# EAGLE board LC adapter (EAGLE 6.5.0)
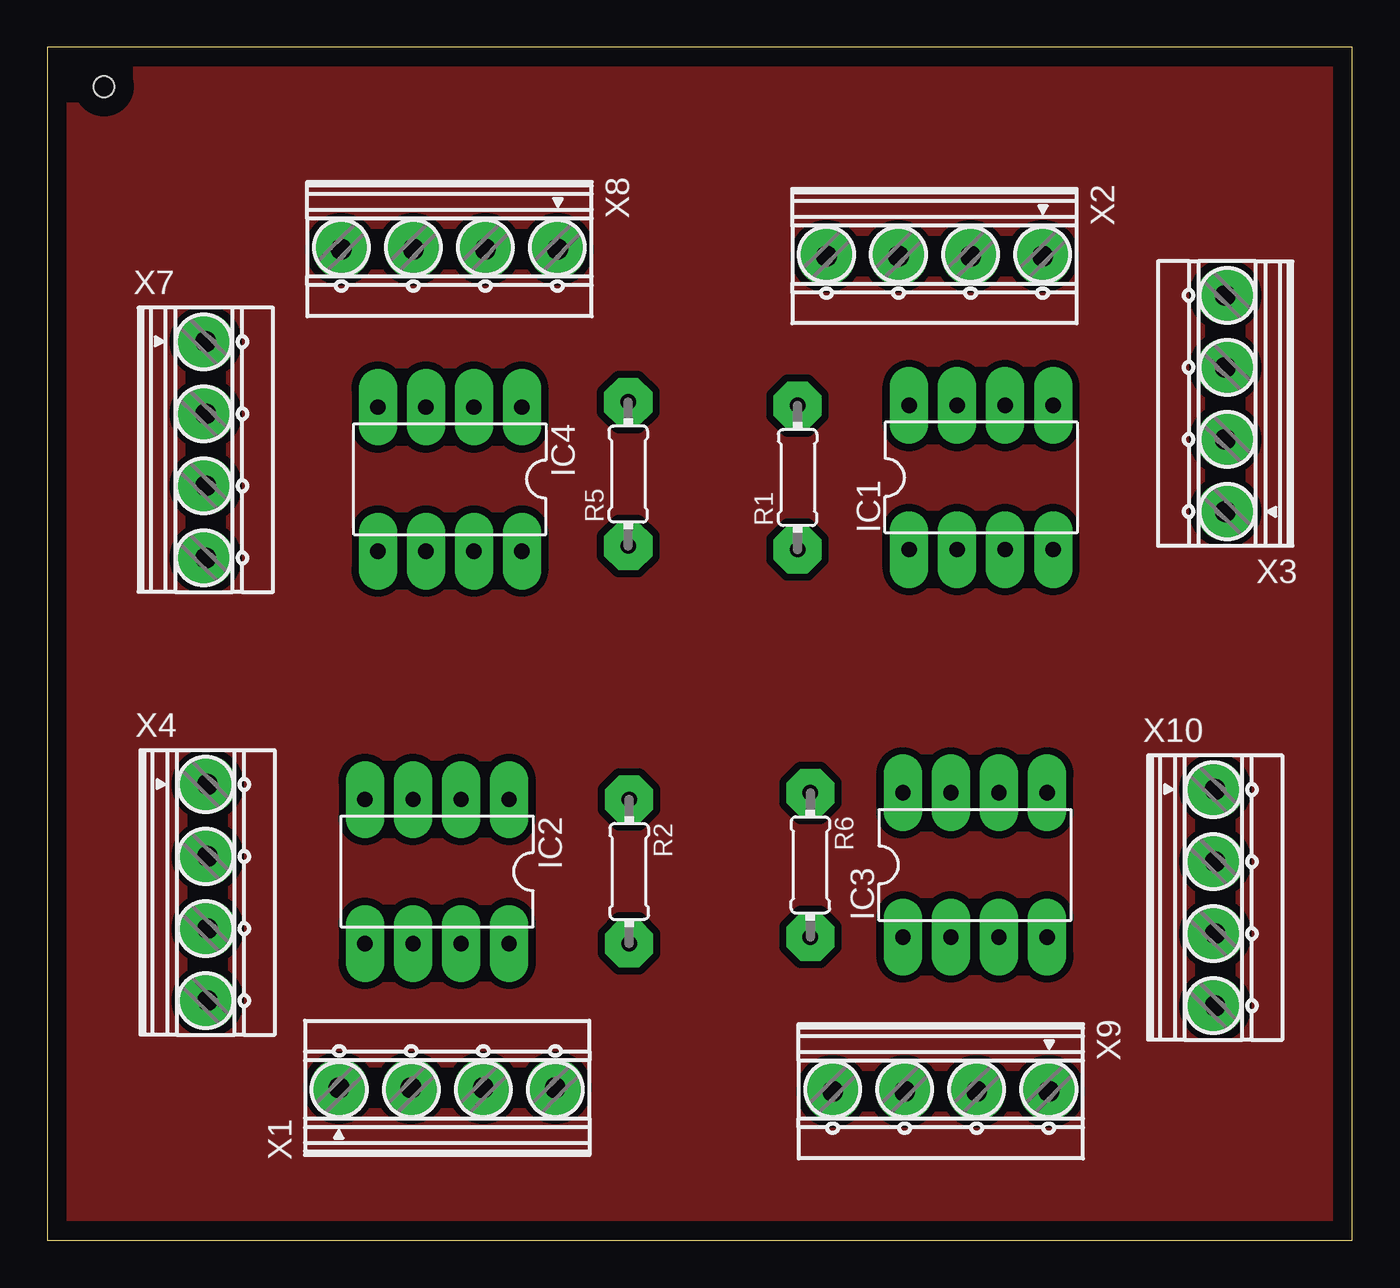
[diagram p0: board, top side]
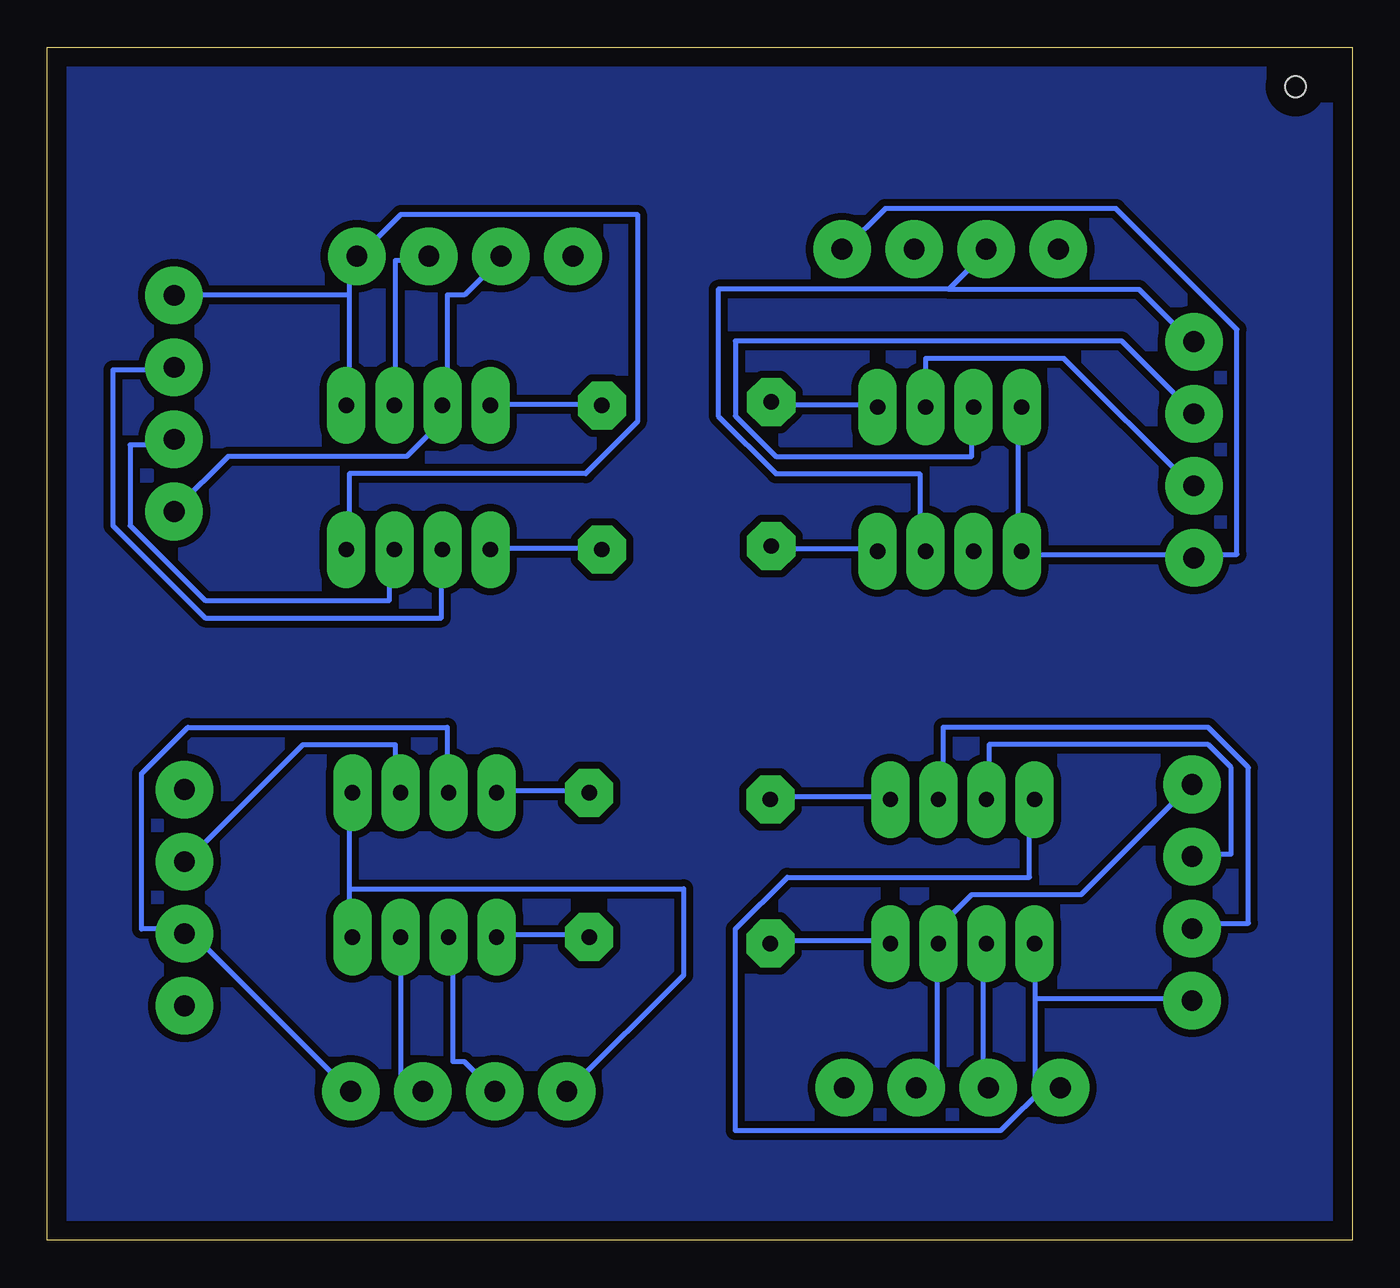
[diagram p1: board, bottom side, seen from below]

Size 69 x 63.09 mm. Coordinates in mm from the lower left corner, seen from the top.
Outline: 0,0 69,0 69,63.09 0,63.09 0,0
Copper layers (1*16): Top 0.035mm / dielectric 1.5mm / Bottom 0.035mm
Design rules "default *": minimum track width 10mil, minimum drill 24mil, track to track 15mil, track to pad 15mil, pad to pad 15mil, via to via 15mil, smd to smd 15mil, copper to edge 40mil, drill to drill 8mil, minimum pad ring 10mil, minimum via ring 8mil, stop-mask expansion 4mil, vias tented up to drill 0mil, thermal gap 10mil
Holes 1.1 mm at 3,61

## Footprints (pad centres in the part's own frame; a part is rotated, then mirrored left to right if it is on the bottom)
DIL08 = drill 0.813 pad 2.032 long: 1 -3.81,-3.81; 2 -1.27,-3.81; 3 1.27,-3.81; 4 3.81,-3.81; 5 3.81,3.81; 6 1.27,3.81; 7 -1.27,3.81; 8 -3.81,3.81
0204/7 = drill 0.813 pad 2.54 octagon: 1 -3.81,0; 2 3.81,0
1727036 = drill 1.1 pad 3.048: 1 -5.715,0; 2 -1.905,0; 3 1.905,0; 4 5.715,0

## Placement (x,y rotation side)
IC1  AD623N  [DIL08]  49.38,40.34 0 top
IC2  AD623N  [DIL08]  20.61,19.5 180 top
IC3  AD623N  [DIL08]  49.05,19.85 0 top
IC4  AD623N  [DIL08]  21.29,40.25 180 top
R1  160  [0204/7]  39.68,40.34 90 top
R2  160  [0204/7]  30.77,19.5 270 top
R5  [0204/7]  30.72,40.52 90 top
R6  [0204/7]  40.35,19.85 270 top
X1  1727036  [1727036]  21.15,8.07 0 top
X2  1727036  [1727036]  46.92,52.04 180 top
X3  1727036  [1727036]  62.29,44.26 90 top
X4  1727036  [1727036]  8.47,18.39 270 top
X7  1727036  [1727036]  8.37,41.8 270 top
X8  1727036  [1727036]  21.26,52.41 180 top
X9  1727036  [1727036]  47.24,7.88 180 top
X10  1727036  [1727036]  61.75,18.12 270 top

## Library data of the parts
IC1-IC4 = pmendes; MF: ALTERA CORPORATION; MPN: AD623ANZ; OC_FARNELL: 9603700; OC_NEWARK: 59K4402
R1 R2 R5 R6 = pmendes
X1-X4 X7-X10 = pmendes; MF: FARNELL; MPN: 1727036; OC_FARNELL: 3704592; OC_NEWARK: 71C4114

## Nets
N$1: IC1.1 R1.1
N$2: IC1.8 R1.2
N$3: IC2.1 R2.1
N$4: IC2.8 R2.2
N$5: IC1.7 X2.3 X3.1
N$6: IC1.6 X2.2
N$7: IC1.4 IC1.5 X2.1 X3.4
N$8: IC3.1 R6.2
N$9: IC1.3 X3.2
N$10: IC1.2 X3.3
N$11: IC3.8 R6.1
N$12: IC2.6 X1.2
N$13: IC3.3 X9.2
N$14: IC3.2 X9.3
N$15: IC3.7 X9.1 X10.3
N$16: IC3.4 IC3.5 X9.4
N$17: IC4.1 R5.2
N$18: IC4.8 R5.1
N$19: IC3.6 X10.2
N$20: IC4.6
N$21: IC4.7 X7.1 X8.3
N$22: IC4.4 IC4.5 X7.4 X8.1
N$23: IC4.2 X7.3
N$24: IC4.3 X7.2
V1+: IC2.7 X1.3 X4.1
V1-: IC2.4 IC2.5 X1.1 X4.4
VIN1+: IC2.3 X4.2
VIN1-: IC2.2 X4.3

## Tracks (layer width: path | path; a pad name or v marks a point on that pad's centre or on a via)
N$1
  Bottom 0.254: IC1.1 45.41,36.58 39.93,36.58 R1.1
N$2
  Bottom 0.254: IC1.8 45.41,44.2 39.93,44.2 R1.2
N$3
  Bottom 0.254: IC2.1 24.69,23.47 30.48,23.47 R2.1
N$4
  Bottom 0.254: IC2.8 24.69,15.85 30.48,15.85 R2.2
N$5
  Bottom 0.254: X2.3 45.11,51.82 46.94,49.99 47.85,49.99 47.85,44.2 IC1.7 48.16,43.89 48.16,43.28 49.99,41.45 59.44,41.45 62.18,38.71 X3.1
N$6
  Bottom 0.254: IC1.6 50.6,44.2 50.6,51.82 49.07,51.82 X2.2
N$7
  Bottom 0.254: IC1.4 53.03,36.58 53.03,40.54 40.54,40.54 37.8,43.28 37.8,54.25 50.29,54.25 52.43,52.12 X2.1 52.73,51.82 53.03,51.82 53.03,49.99 | 53.03,49.99 53.03,44.2 IC1.5 | 53.03,49.99 62.18,49.99 X3.4
N$8
  Bottom 0.254: IC3.1 45.11,16.15 40.54,16.15 R6.2
N$9
  Bottom 0.254: IC1.3 50.9,36.27 50.9,33.83 60.66,33.83 64.62,37.8 64.62,42.06 62.48,42.06 X3.2
N$10
  Bottom 0.254: IC1.2 48.16,36.27 48.16,32.92 60.66,32.92 65.53,37.8 65.53,46.02 62.48,46.02 X3.3
N$11
  Bottom 0.254: IC3.8 45.11,23.77 40.54,23.77 R6.1
N$12
  Bottom 0.254: IC2.6 19.51,15.54 19.51,8.23 X1.2
N$13
  Bottom 0.254: IC3.3 50.29,15.85 50.29,7.92 49.38,7.92 X9.2
N$14
  Bottom 0.254: IC3.2 47.55,15.85 47.55,9.45 46.94,9.45 45.41,7.92 X9.3
N$15
  Bottom 0.254: IC3.7 47.85,23.77 47.85,27.13 61.57,27.13 64.01,24.69 64.01,16.46 61.87,16.46 X10.3 61.57,16.15 61.27,16.15 53.03,7.92 X9.1
N$16
  Bottom 0.254: 53.03,18.59 53.03,23.47 IC3.5 | 53.03,18.59 53.03,16.15 IC3.4 | 53.03,18.59 35.36,18.59 35.36,14.02 41.45,7.92 X9.4
N$17
  Bottom 0.254: IC4.1 25.3,44.2 30.48,44.2 R5.2
N$18
  Bottom 0.254: IC4.8 25.3,36.58 30.48,36.58 R5.1
N$19
  Bottom 0.254: IC3.6 50.6,23.77 50.6,26.21 55.47,26.21 61.57,20.12 X10.2
N$21
  Bottom 0.254: 21.34,50.29 33.53,50.29 33.53,43.59 30.48,40.54 22.86,40.54 22.86,36.58 IC4.7 | 21.34,50.29 19.51,52.12 X8.3 | 21.34,50.29 11.28,50.29 8.53,47.55 X7.1
N$22
  Bottom 0.254: IC4.4 17.68,43.89 17.68,36.58 IC4.5 17.37,36.27 8.53,36.27 X7.4 8.23,36.27 6.1,36.27 6.1,48.16 12.5,54.56 24.69,54.56 26.82,52.43 X8.1
N$23
  Bottom 0.254: IC4.2 22.55,44.2 22.55,46.63 15.24,46.63 8.53,39.93 X7.3
N$24
  Bottom 0.254: IC4.3 20.12,43.89 20.12,41.45 30.48,41.45 32.61,43.59 32.61,47.55 12.19,47.55 8.53,43.89 X7.2
N$25
  pour Bottom: -0.3,64.01 68.88,64.01 68.88,-0.3 0,-0.3 0,63.7
N$26
  pour Top: 0,63.09 69.19,63.09 69.19,-0.3 0,-0.3 0,62.79
V1+
  Bottom 0.254: X1.3 22.86,8.23 21.95,8.23 21.95,15.54 IC2.7 21.64,15.85 21.64,16.76 20.12,18.29 14.33,18.29 8.53,24.08 X4.1
V1-
  Bottom 0.254: 16.76,12.8 16.76,8.23 16.15,8.23 | 16.76,12.8 16.76,15.54 IC2.5 | 16.15,8.23 15.54,8.23 X1.1 16.15,8.23 | 16.15,8.23 18.59,5.79 32.61,5.79 32.61,16.46 29.87,19.2 17.07,19.2 17.07,23.16 IC2.4 | 16.76,12.8 8.53,12.8 X4.4
VIN1+
  Bottom 0.254: IC2.3 19.2,23.47 19.2,26.21 7.62,26.21 6.4,24.99 6.4,20.42 8.23,20.42 X4.2
VIN1-
  Bottom 0.254: IC2.2 21.64,23.47 21.64,27.13 7.62,27.13 5.49,24.99 5.49,16.76 8.23,16.76 X4.3